# Altium PCB transformer.PcbDoc (part 2 of 3)
Units mm, origin at the board's own origin, x right, y up, seen from the top; angles counter-clockwise.
Board outline 350 x 350 mm, 3 copper layers (GND Top, Middle Layer, GND Bottom), stack 0.497 mm thick; 13 components, 13 nets, 121 pads, 5535 vias.
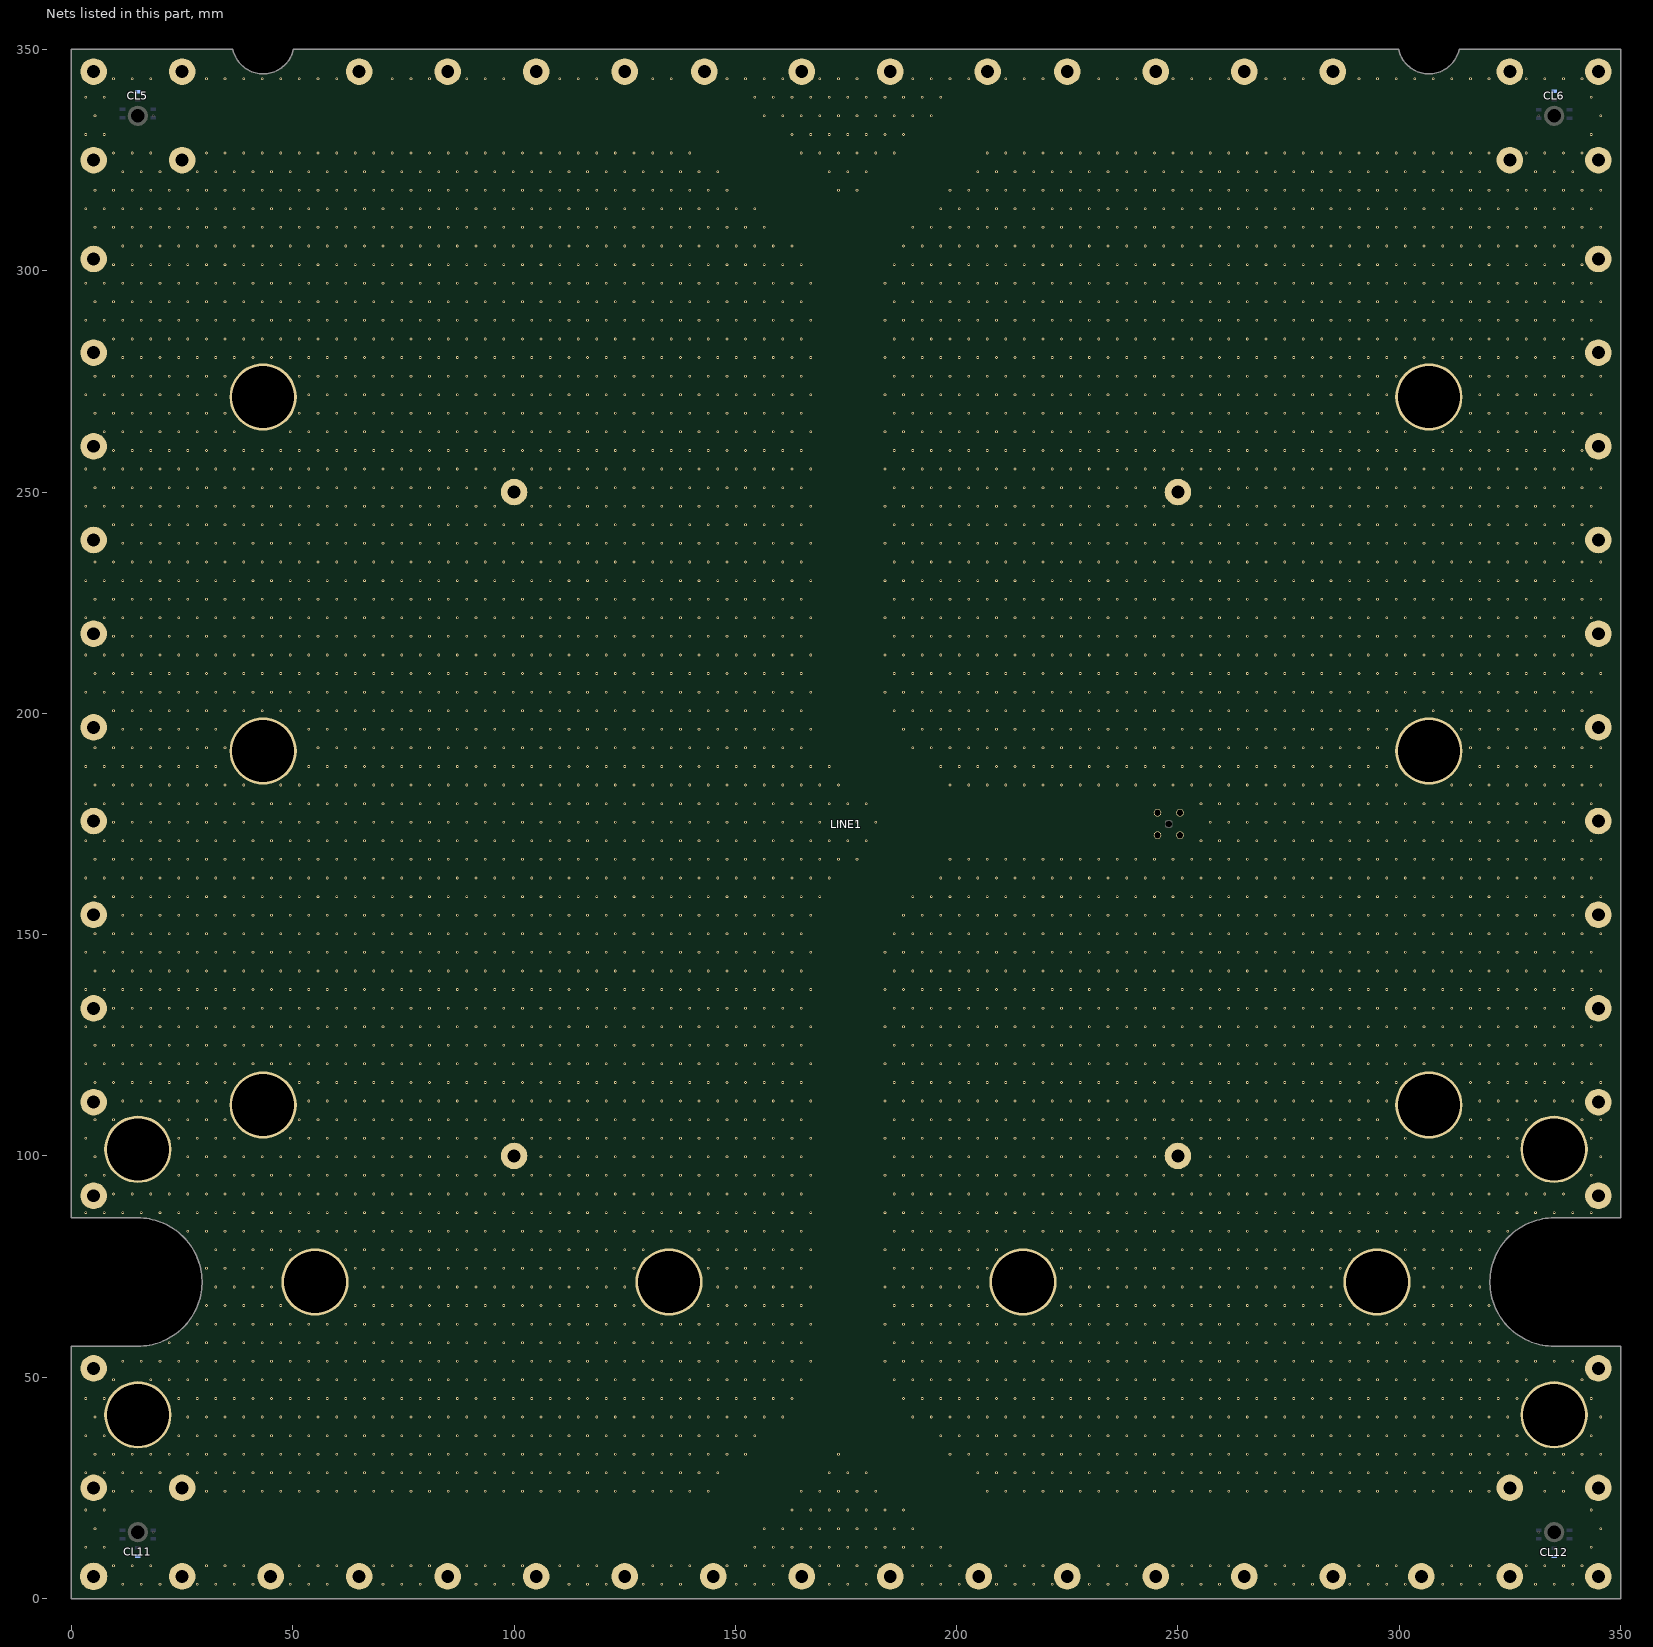
[diagram p3: the nets of this part, all layers, seen from the top]

## Via types
v1: diameter 0.6/0.6/0.6 (per signal layer), hole 0.3, GND Top to GND Bottom, 5535 vias

## Nets (pads, with @x,y where several pads share a name; then routed paths per layer and width w, separated by ;. In a path a pad name is that pad's centre, name@x,y a point inside that pad or via, vN(x,y) a via of type N, cw(c..) or ccw(c..) an arc to the next point about the centre after c; other vN are vias at no path point) (continued)
GND: (continued)
  other v1: 11.6,3.2 15.8,3.2 20,3.2 28.4,3.2 32.6,3.2 36.8,3.2 41,3.2 49.4,3.2 53.6,3.2 57.8,3.2 70.4,3.2 74.6,3.2 78.8,3.2 91.4,3.2 95.6,3.2 99.8,3.2 112.4,3.2 116.6,3.2 120.8,3.2 129.2,3.2 133.4,3.2 137.6,3.2 150.2,3.2 154.4,3.2 158.6,3.2 171.2,3.2 175.4,3.2 179.6,3.2 192.2,3.2 196.4,3.2 200.6,3.2 209,3.2 213.2,3.2 217.4,3.2 221.6,3.2 230,3.2 234.2,3.2 238.4,3.2 251,3.2 255.2,3.2 259.4,3.2 272,3.2 276.2,3.2 280.4,3.2 288.8,3.2 293,3.2 297.2,3.2 301.4,3.2 309.8,3.2 314,3.2 318.2,3.2 330.8,3.2 335,3.2 339.2,3.2 9.5,7.4 13.7,7.4 17.9,7.4 30.5,7.4 34.7,7.4 38.9,7.4 51.5,7.4 55.7,7.4 59.9,7.4 68.3,7.4 72.5,7.4 76.7,7.4 80.9,7.4 89.3,7.4 93.5,7.4 97.7,7.4 101.9,7.4 110.3,7.4 114.5,7.4 118.7,7.4 131.3,7.4 135.5,7.4 139.7,7.4 148.1,7.4 152.3,7.4 156.5,7.4 160.7,7.4 169.1,7.4 173.3,7.4 177.5,7.4 181.7,7.4 190.1,7.4 194.3,7.4 198.5,7.4 211.1,7.4 215.3,7.4 219.5,7.4 232.1,7.4 236.3,7.4 240.5,7.4 248.9,7.4 253.1,7.4 257.3,7.4 261.5,7.4 269.9,7.4 274.1,7.4 278.3,7.4 290.9,7.4 295.1,7.4 299.3,7.4 311.9,7.4 316.1,7.4 320.3,7.4 328.7,7.4 332.9,7.4 337.1,7.4 341.3,7.4 3.2,11.6 7.4,11.6 154.4,11.6 158.6,11.6 162.8,11.6 167,11.6 171.2,11.6 175.4,11.6 179.6,11.6 183.8,11.6 188,11.6 192.2,11.6 196.4,11.6 343.4,11.6 5.3,15.8 156.5,15.8 160.7,15.8 164.9,15.8 169.1,15.8 173.3,15.8 177.5,15.8 181.7,15.8 185.9,15.8 190.1,15.8 345.5,15.8 3.2,20 7.4,20 162.8,20 167,20 171.2,20 175.4,20 179.6,20 183.8,20 188,20 343.4,20 9.5,24.2 13.7,24.2 17.9,24.2 30.5,24.2 34.7,24.2 38.9,24.2 43.1,24.2 47.3,24.2 51.5,24.2 55.7,24.2 59.9,24.2 64.1,24.2 68.3,24.2 72.5,24.2 76.7,24.2 80.9,24.2 85.1,24.2 89.3,24.2 93.5,24.2 97.7,24.2 101.9,24.2 106.1,24.2 110.3,24.2 114.5,24.2 118.7,24.2 122.9,24.2 127.1,24.2 131.3,24.2 135.5,24.2 139.7,24.2 143.9,24.2 164.9,24.2 169.1,24.2 173.3,24.2 177.5,24.2 181.7,24.2 206.9,24.2 211.1,24.2 215.3,24.2 219.5,24.2 223.7,24.2 227.9,24.2 232.1,24.2 236.3,24.2 240.5,24.2 244.7,24.2 248.9,24.2 253.1,24.2 257.3,24.2 261.5,24.2 265.7,24.2 269.9,24.2 274.1,24.2 278.3,24.2 282.5,24.2 286.7,24.2 290.9,24.2 295.1,24.2 299.3,24.2 303.5,24.2 307.7,24.2 311.9,24.2 316.1,24.2 320.3,24.2 332.9,24.2 337.1,24.2 3.2,28.4 7.4,28.4 11.6,28.4 15.8,28.4 20,28.4 28.4,28.4 32.6,28.4 36.8,28.4 41,28.4 45.2,28.4 49.4,28.4 53.6,28.4 57.8,28.4 62,28.4 66.2,28.4 70.4,28.4 74.6,28.4 78.8,28.4 83,28.4 87.2,28.4 91.4,28.4 95.6,28.4 99.8,28.4 104,28.4 108.2,28.4 112.4,28.4 116.6,28.4 120.8,28.4 125,28.4 129.2,28.4 133.4,28.4 137.6,28.4 141.8,28.4 146,28.4 171.2,28.4 175.4,28.4 179.6,28.4 204.8,28.4 209,28.4 213.2,28.4 217.4,28.4 221.6,28.4 225.8,28.4 230,28.4 234.2,28.4 238.4,28.4 242.6,28.4 246.8,28.4 251,28.4 255.2,28.4 259.4,28.4 263.6,28.4 267.8,28.4 272,28.4 276.2,28.4 280.4,28.4 284.6,28.4 288.8,28.4 293,28.4 297.2,28.4 301.4,28.4 305.6,28.4 309.8,28.4 314,28.4 318.2,28.4 322.4,28.4 330.8,28.4 335,28.4 339.2,28.4 5.3,32.6 9.5,32.6 13.7,32.6 17.9,32.6 22.1,32.6 26.3,32.6 30.5,32.6 34.7,32.6 38.9,32.6 43.1,32.6 47.3,32.6 51.5,32.6 55.7,32.6 59.9,32.6 64.1,32.6 68.3,32.6 72.5,32.6 76.7,32.6 80.9,32.6 85.1,32.6 89.3,32.6 93.5,32.6 97.7,32.6 101.9,32.6 106.1,32.6 110.3,32.6 114.5,32.6 118.7,32.6 122.9,32.6 127.1,32.6 131.3,32.6 135.5,32.6 139.7,32.6 143.9,32.6 148.1,32.6 152.3,32.6 173.3,32.6 198.5,32.6 202.7,32.6 206.9,32.6 211.1,32.6 215.3,32.6 219.5,32.6 223.7,32.6 227.9,32.6 232.1,32.6 236.3,32.6 240.5,32.6 244.7,32.6 248.9,32.6 253.1,32.6 257.3,32.6 261.5,32.6 265.7,32.6 269.9,32.6 274.1,32.6 278.3,32.6 282.5,32.6 286.7,32.6 290.9,32.6 295.1,32.6 299.3,32.6 303.5,32.6 307.7,32.6 311.9,32.6 316.1,32.6 320.3,32.6 324.5,32.6 328.7,32.6 332.9,32.6 337.1,32.6 341.3,32.6 345.5,32.6 3.2,36.8 7.4,36.8 24.2,36.8 28.4,36.8 32.6,36.8 36.8,36.8 41,36.8 45.2,36.8 49.4,36.8 53.6,36.8 57.8,36.8 62,36.8 66.2,36.8 70.4,36.8 74.6,36.8 78.8,36.8 83,36.8 87.2,36.8 91.4,36.8 95.6,36.8 99.8,36.8 104,36.8 108.2,36.8 112.4,36.8 116.6,36.8 120.8,36.8 125,36.8 129.2,36.8 133.4,36.8 137.6,36.8 141.8,36.8 146,36.8 150.2,36.8 154.4,36.8 196.4,36.8 200.6,36.8 204.8,36.8 209,36.8 213.2,36.8 217.4,36.8 221.6,36.8 225.8,36.8 230,36.8 234.2,36.8 238.4,36.8 242.6,36.8 246.8,36.8 251,36.8 255.2,36.8 259.4,36.8 263.6,36.8 267.8,36.8 272,36.8 276.2,36.8 280.4,36.8 284.6,36.8 288.8,36.8 293,36.8 297.2,36.8 301.4,36.8 305.6,36.8 309.8,36.8 314,36.8 318.2,36.8 322.4,36.8 326.6,36.8 343.4,36.8 5.3,41 26.3,41 30.5,41 34.7,41 38.9,41 43.1,41 47.3,41 51.5,41 55.7,41 59.9,41 64.1,41 68.3,41 72.5,41 76.7,41 80.9,41 85.1,41 89.3,41 93.5,41 97.7,41 101.9,41 106.1,41 110.3,41 114.5,41 118.7,41 122.9,41 127.1,41 131.3,41 135.5,41 139.7,41 143.9,41 148.1,41 152.3,41 156.5,41 160.7,41 190.1,41 194.3,41 198.5,41 202.7,41 206.9,41 211.1,41 215.3,41 219.5,41 223.7,41 227.9,41 232.1,41 236.3,41 240.5,41 244.7,41 248.9,41 253.1,41 257.3,41 261.5,41 265.7,41 269.9,41 274.1,41 278.3,41 282.5,41 286.7,41 290.9,41 295.1,41 299.3,41 303.5,41 307.7,41 311.9,41 316.1,41 320.3,41 324.5,41 345.5,41 3.2,45.2 7.4,45.2 24.2,45.2 28.4,45.2 32.6,45.2 36.8,45.2 41,45.2 45.2,45.2 49.4,45.2 53.6,45.2 57.8,45.2 62,45.2 66.2,45.2 70.4,45.2 74.6,45.2 78.8,45.2 83,45.2 87.2,45.2 91.4,45.2 95.6,45.2 99.8,45.2 104,45.2 108.2,45.2 112.4,45.2 116.6,45.2 120.8,45.2 125,45.2 129.2,45.2 133.4,45.2 137.6,45.2 141.8,45.2 146,45.2 150.2,45.2 154.4,45.2 158.6,45.2 162.8,45.2 188,45.2 192.2,45.2 196.4,45.2 200.6,45.2 204.8,45.2 209,45.2 213.2,45.2 217.4,45.2 221.6,45.2 225.8,45.2 230,45.2 234.2,45.2 238.4,45.2 242.6,45.2 246.8,45.2 251,45.2 255.2,45.2 259.4,45.2 263.6,45.2 267.8,45.2 272,45.2 276.2,45.2 280.4,45.2 284.6,45.2 288.8,45.2 293,45.2 297.2,45.2 301.4,45.2 305.6,45.2 309.8,45.2 314,45.2 318.2,45.2 322.4,45.2 326.6,45.2 343.4,45.2 9.5,49.4 17.9,49.4 22.1,49.4 26.3,49.4 30.5,49.4 34.7,49.4 38.9,49.4 43.1,49.4 47.3,49.4 51.5,49.4 55.7,49.4 59.9,49.4 64.1,49.4 68.3,49.4 72.5,49.4 76.7,49.4 80.9,49.4 85.1,49.4 89.3,49.4 93.5,49.4 97.7,49.4 101.9,49.4 106.1,49.4 110.3,49.4 114.5,49.4 118.7,49.4 122.9,49.4 127.1,49.4 131.3,49.4 135.5,49.4 139.7,49.4 143.9,49.4 148.1,49.4 152.3,49.4 156.5,49.4 160.7,49.4 164.9,49.4 185.9,49.4 190.1,49.4 194.3,49.4 198.5,49.4 202.7,49.4 206.9,49.4 211.1,49.4 215.3,49.4 219.5,49.4 223.7,49.4 227.9,49.4 232.1,49.4 236.3,49.4 240.5,49.4 244.7,49.4 248.9,49.4 253.1,49.4 257.3,49.4 261.5,49.4 265.7,49.4 269.9,49.4 274.1,49.4 278.3,49.4 282.5,49.4 286.7,49.4 290.9,49.4 295.1,49.4 299.3,49.4 303.5,49.4 307.7,49.4 311.9,49.4 316.1,49.4 320.3,49.4 324.5,49.4 328.7,49.4 341.3,49.4 11.6,53.6 15.8,53.6 20,53.6 24.2,53.6 28.4,53.6 32.6,53.6 36.8,53.6 41,53.6 45.2,53.6 49.4,53.6 53.6,53.6 57.8,53.6 62,53.6 66.2,53.6 70.4,53.6 74.6,53.6 78.8,53.6 83,53.6 87.2,53.6 91.4,53.6 95.6,53.6 99.8,53.6 104,53.6 108.2,53.6 112.4,53.6 116.6,53.6 120.8,53.6 125,53.6 129.2,53.6 133.4,53.6 137.6,53.6 141.8,53.6 146,53.6 150.2,53.6 154.4,53.6 158.6,53.6 162.8,53.6 167,53.6 183.8,53.6 188,53.6 192.2,53.6 196.4,53.6 200.6,53.6 204.8,53.6 209,53.6 213.2,53.6 217.4,53.6 221.6,53.6 225.8,53.6 230,53.6 234.2,53.6 238.4,53.6 242.6,53.6 246.8,53.6 251,53.6 255.2,53.6 259.4,53.6 263.6,53.6 267.8,53.6 272,53.6 276.2,53.6 280.4,53.6 284.6,53.6 288.8,53.6 293,53.6 297.2,53.6 301.4,53.6 305.6,53.6 309.8,53.6 314,53.6 318.2,53.6 322.4,53.6 326.6,53.6 330.8,53.6 335,53.6 339.2,53.6 22.1,57.8 26.3,57.8 30.5,57.8 34.7,57.8 38.9,57.8 43.1,57.8 47.3,57.8 51.5,57.8 55.7,57.8 59.9,57.8 64.1,57.8 68.3,57.8 72.5,57.8 76.7,57.8 80.9,57.8 85.1,57.8 89.3,57.8 93.5,57.8 97.7,57.8 101.9,57.8 106.1,57.8 110.3,57.8 114.5,57.8 118.7,57.8 122.9,57.8 127.1,57.8 131.3,57.8 135.5,57.8 139.7,57.8 143.9,57.8 148.1,57.8 152.3,57.8 156.5,57.8 160.7,57.8 164.9,57.8 185.9,57.8 190.1,57.8 194.3,57.8 198.5,57.8 202.7,57.8 206.9,57.8 211.1,57.8 215.3,57.8 219.5,57.8 223.7,57.8 227.9,57.8 232.1,57.8 236.3,57.8 240.5,57.8 244.7,57.8 248.9,57.8 253.1,57.8 257.3,57.8 261.5,57.8 265.7,57.8 269.9,57.8 274.1,57.8 278.3,57.8 282.5,57.8 286.7,57.8 290.9,57.8 295.1,57.8 299.3,57.8 303.5,57.8 307.7,57.8 311.9,57.8 316.1,57.8 320.3,57.8 324.5,57.8 28.4,62 32.6,62 36.8,62 41,62 45.2,62 49.4,62 53.6,62 57.8,62 62,62 66.2,62 70.4,62 74.6,62 78.8,62 83,62 87.2,62 91.4,62 95.6,62 99.8,62 104,62 108.2,62 112.4,62 116.6,62 120.8,62 125,62 129.2,62 133.4,62 137.6,62 141.8,62 146,62 150.2,62 154.4,62 158.6,62 162.8,62 167,62 183.8,62 188,62 192.2,62 196.4,62 200.6,62 204.8,62 209,62 213.2,62 217.4,62 221.6,62 225.8,62 230,62 234.2,62 238.4,62 242.6,62 246.8,62 251,62 255.2,62 259.4,62 263.6,62 267.8,62 272,62 276.2,62 280.4,62 284.6,62 288.8,62 293,62 297.2,62 301.4,62 305.6,62 309.8,62 314,62 318.2,62 322.4,62 30.5,66.2 34.7,66.2 38.9,66.2 43.1,66.2 47.3,66.2 64.1,66.2 68.3,66.2 72.5,66.2 76.7,66.2 80.9,66.2 85.1,66.2 89.3,66.2 93.5,66.2 97.7,66.2 101.9,66.2 106.1,66.2 110.3,66.2 114.5,66.2 118.7,66.2 122.9,66.2 127.1,66.2 143.9,66.2 148.1,66.2 152.3,66.2 156.5,66.2 160.7,66.2 164.9,66.2 185.9,66.2 190.1,66.2 194.3,66.2 198.5,66.2 202.7,66.2 206.9,66.2 223.7,66.2 227.9,66.2 232.1,66.2 236.3,66.2 240.5,66.2 244.7,66.2 248.9,66.2 253.1,66.2 257.3,66.2 261.5,66.2 265.7,66.2 269.9,66.2 274.1,66.2 278.3,66.2 282.5,66.2 286.7,66.2 303.5,66.2 307.7,66.2 311.9,66.2 316.1,66.2 320.3,66.2 32.6,70.4 36.8,70.4 41,70.4 45.2,70.4 66.2,70.4 70.4,70.4 74.6,70.4 78.8,70.4 83,70.4 87.2,70.4 91.4,70.4 95.6,70.4 99.8,70.4 104,70.4 108.2,70.4 112.4,70.4 116.6,70.4 120.8,70.4 125,70.4 146,70.4 150.2,70.4 154.4,70.4 158.6,70.4 162.8,70.4 167,70.4 183.8,70.4 188,70.4 192.2,70.4 196.4,70.4 200.6,70.4 204.8,70.4 225.8,70.4 230,70.4 234.2,70.4 238.4,70.4 242.6,70.4 246.8,70.4 251,70.4 255.2,70.4 259.4,70.4 263.6,70.4 267.8,70.4 272,70.4 276.2,70.4 280.4,70.4 284.6,70.4 305.6,70.4 309.8,70.4 314,70.4 318.2,70.4 30.5,74.6 34.7,74.6 38.9,74.6 43.1,74.6 64.1,74.6 68.3,74.6 72.5,74.6 76.7,74.6 80.9,74.6 85.1,74.6 89.3,74.6 93.5,74.6 97.7,74.6 101.9,74.6 106.1,74.6 110.3,74.6 114.5,74.6 118.7,74.6 122.9,74.6 127.1,74.6 143.9,74.6 148.1,74.6 152.3,74.6 156.5,74.6 160.7,74.6 164.9,74.6 185.9,74.6 190.1,74.6 194.3,74.6 198.5,74.6 202.7,74.6 206.9,74.6 223.7,74.6 227.9,74.6 232.1,74.6 236.3,74.6 240.5,74.6 244.7,74.6 248.9,74.6 253.1,74.6 257.3,74.6 261.5,74.6 265.7,74.6 269.9,74.6 274.1,74.6 278.3,74.6 282.5,74.6 286.7,74.6 303.5,74.6 307.7,74.6 311.9,74.6 316.1,74.6 32.6,78.8 36.8,78.8 41,78.8 45.2,78.8 49.4,78.8 62,78.8 66.2,78.8 70.4,78.8 74.6,78.8 78.8,78.8 83,78.8 87.2,78.8 91.4,78.8 95.6,78.8 99.8,78.8 104,78.8 108.2,78.8 112.4,78.8 116.6,78.8 120.8,78.8 125,78.8 129.2,78.8 141.8,78.8 146,78.8 150.2,78.8 154.4,78.8 158.6,78.8 162.8,78.8 167,78.8 183.8,78.8 188,78.8 192.2,78.8 196.4,78.8 200.6,78.8 204.8,78.8 209,78.8 221.6,78.8 225.8,78.8 230,78.8 234.2,78.8 238.4,78.8 242.6,78.8 246.8,78.8 251,78.8 255.2,78.8 259.4,78.8 263.6,78.8 267.8,78.8 272,78.8 276.2,78.8 280.4,78.8 284.6,78.8 288.8,78.8 301.4,78.8 305.6,78.8 309.8,78.8 314,78.8 318.2,78.8 26.3,83 30.5,83 34.7,83 38.9,83 43.1,83 47.3,83 51.5,83 55.7,83 59.9,83 64.1,83 68.3,83 72.5,83 76.7,83 80.9,83 85.1,83 89.3,83 93.5,83 97.7,83 101.9,83 106.1,83 110.3,83 114.5,83 118.7,83 122.9,83 127.1,83 131.3,83 135.5,83 139.7,83 143.9,83 148.1,83 152.3,83 156.5,83 160.7,83 164.9,83 185.9,83 190.1,83 194.3,83 198.5,83 202.7,83 206.9,83 211.1,83 215.3,83 219.5,83 223.7,83 227.9,83 232.1,83 236.3,83 240.5,83 244.7,83 248.9,83 253.1,83 257.3,83 261.5,83 265.7,83 269.9,83 274.1,83 278.3,83 282.5,83 286.7,83 290.9,83 295.1,83 299.3,83 303.5,83 307.7,83 311.9,83 316.1,83 320.3,83 324.5,83 3.2,87.2 7.4,87.2 11.6,87.2 15.8,87.2 20,87.2 24.2,87.2 28.4,87.2 32.6,87.2 36.8,87.2 41,87.2 45.2,87.2 49.4,87.2 53.6,87.2 57.8,87.2 62,87.2 66.2,87.2 70.4,87.2 74.6,87.2 78.8,87.2 83,87.2 87.2,87.2 91.4,87.2 95.6,87.2 99.8,87.2 104,87.2 108.2,87.2 112.4,87.2 116.6,87.2 120.8,87.2 125,87.2 129.2,87.2 133.4,87.2 137.6,87.2 141.8,87.2 146,87.2 150.2,87.2 154.4,87.2 158.6,87.2 162.8,87.2 167,87.2 183.8,87.2 188,87.2 192.2,87.2 196.4,87.2 200.6,87.2 204.8,87.2 209,87.2 213.2,87.2 217.4,87.2 221.6,87.2 225.8,87.2 230,87.2 234.2,87.2 238.4,87.2 242.6,87.2 246.8,87.2 251,87.2 255.2,87.2 259.4,87.2 263.6,87.2 267.8,87.2 272,87.2 276.2,87.2 280.4,87.2 284.6,87.2 288.8,87.2 293,87.2 297.2,87.2 301.4,87.2 305.6,87.2 309.8,87.2 314,87.2 318.2,87.2 322.4,87.2 326.6,87.2 330.8,87.2 335,87.2 339.2,87.2 343.4,87.2 9.5,91.4 13.7,91.4 17.9,91.4 22.1,91.4 26.3,91.4 30.5,91.4 34.7,91.4 38.9,91.4 43.1,91.4 47.3,91.4 51.5,91.4 55.7,91.4 59.9,91.4 64.1,91.4 68.3,91.4 72.5,91.4 76.7,91.4 80.9,91.4 85.1,91.4 89.3,91.4 93.5,91.4 97.7,91.4 101.9,91.4 106.1,91.4 110.3,91.4 114.5,91.4 118.7,91.4 122.9,91.4 127.1,91.4 131.3,91.4 135.5,91.4 139.7,91.4 143.9,91.4 148.1,91.4 152.3,91.4 156.5,91.4 160.7,91.4 164.9,91.4 185.9,91.4 190.1,91.4 194.3,91.4 198.5,91.4 202.7,91.4 206.9,91.4 211.1,91.4 215.3,91.4 219.5,91.4 223.7,91.4 227.9,91.4 232.1,91.4 236.3,91.4 240.5,91.4 244.7,91.4 248.9,91.4 253.1,91.4 257.3,91.4 261.5,91.4 265.7,91.4 269.9,91.4 274.1,91.4 278.3,91.4 282.5,91.4 286.7,91.4 290.9,91.4 295.1,91.4 299.3,91.4 303.5,91.4 307.7,91.4 311.9,91.4 316.1,91.4 320.3,91.4 324.5,91.4 328.7,91.4 332.9,91.4 337.1,91.4 3.2,95.6 7.4,95.6 24.2,95.6 28.4,95.6 32.6,95.6 36.8,95.6 41,95.6 45.2,95.6 49.4,95.6 53.6,95.6 57.8,95.6 62,95.6 66.2,95.6 70.4,95.6 74.6,95.6 78.8,95.6 83,95.6 87.2,95.6 91.4,95.6 95.6,95.6 99.8,95.6 104,95.6 108.2,95.6 112.4,95.6 116.6,95.6 120.8,95.6 125,95.6 129.2,95.6 133.4,95.6 137.6,95.6 141.8,95.6 146,95.6 150.2,95.6 154.4,95.6 158.6,95.6 162.8,95.6 167,95.6 183.8,95.6 188,95.6 192.2,95.6 196.4,95.6 200.6,95.6 204.8,95.6 209,95.6 213.2,95.6 217.4,95.6 221.6,95.6 225.8,95.6 230,95.6 234.2,95.6 238.4,95.6 242.6,95.6 246.8,95.6 251,95.6 255.2,95.6 259.4,95.6 263.6,95.6 267.8,95.6 272,95.6 276.2,95.6 280.4,95.6 284.6,95.6 288.8,95.6 293,95.6 297.2,95.6 301.4,95.6 305.6,95.6 309.8,95.6 314,95.6 318.2,95.6 322.4,95.6 326.6,95.6 343.4,95.6 5.3,99.8 26.3,99.8 30.5,99.8 34.7,99.8 38.9,99.8 43.1,99.8 47.3,99.8 51.5,99.8 55.7,99.8 59.9,99.8 64.1,99.8 68.3,99.8 72.5,99.8 76.7,99.8 80.9,99.8 85.1,99.8 89.3,99.8 93.5,99.8 106.1,99.8 110.3,99.8 114.5,99.8 118.7,99.8 122.9,99.8 127.1,99.8 131.3,99.8 135.5,99.8 139.7,99.8 143.9,99.8 148.1,99.8 152.3,99.8 156.5,99.8 160.7,99.8 164.9,99.8 185.9,99.8 190.1,99.8 194.3,99.8 198.5,99.8 202.7,99.8 206.9,99.8 211.1,99.8 215.3,99.8 219.5,99.8 223.7,99.8 227.9,99.8 232.1,99.8 236.3,99.8 240.5,99.8 244.7,99.8 257.3,99.8 261.5,99.8 265.7,99.8 269.9,99.8 274.1,99.8 278.3,99.8 282.5,99.8 286.7,99.8 290.9,99.8 295.1,99.8 299.3,99.8 303.5,99.8 307.7,99.8 311.9,99.8 316.1,99.8 320.3,99.8 324.5,99.8 345.5,99.8 3.2,104 24.2,104 28.4,104 32.6,104 36.8,104 49.4,104 53.6,104 57.8,104 62,104 66.2,104 70.4,104 74.6,104 78.8,104 83,104 87.2,104 91.4,104 95.6,104 99.8,104 104,104 108.2,104 112.4,104 116.6,104 120.8,104 125,104 129.2,104 133.4,104 137.6,104 141.8,104 146,104 150.2,104 154.4,104 158.6,104 162.8,104 167,104 183.8,104 188,104 192.2,104 196.4,104 200.6,104 204.8,104 209,104 213.2,104 217.4,104 221.6,104 225.8,104 230,104 234.2,104 238.4,104 242.6,104 246.8,104 251,104 255.2,104 259.4,104 263.6,104 267.8,104 272,104 276.2,104 280.4,104 284.6,104 288.8,104 293,104 297.2,104 301.4,104 314,104 318.2,104 322.4,104 326.6,104 343.4,104 5.3,108.2 9.5,108.2 22.1,108.2 26.3,108.2 30.5,108.2 34.7,108.2 51.5,108.2 55.7,108.2 59.9,108.2 64.1,108.2 68.3,108.2 72.5,108.2 76.7,108.2 80.9,108.2 85.1,108.2 89.3,108.2 93.5,108.2 97.7,108.2 101.9,108.2 106.1,108.2 110.3,108.2 114.5,108.2 118.7,108.2 122.9,108.2 127.1,108.2 131.3,108.2 135.5,108.2 139.7,108.2 143.9,108.2 148.1,108.2 152.3,108.2 156.5,108.2 160.7,108.2 164.9,108.2 185.9,108.2 190.1,108.2 194.3,108.2 198.5,108.2 202.7,108.2 206.9,108.2 211.1,108.2 215.3,108.2 219.5,108.2 223.7,108.2 227.9,108.2 232.1,108.2 236.3,108.2 240.5,108.2 244.7,108.2 248.9,108.2 253.1,108.2 257.3,108.2 261.5,108.2 265.7,108.2 269.9,108.2 274.1,108.2 278.3,108.2 282.5,108.2 286.7,108.2 290.9,108.2 295.1,108.2 316.1,108.2 320.3,108.2 324.5,108.2 328.7,108.2 341.3,108.2 345.5,108.2 11.6,112.4 15.8,112.4 20,112.4 24.2,112.4 28.4,112.4 32.6,112.4 53.6,112.4 57.8,112.4 62,112.4 66.2,112.4 70.4,112.4 74.6,112.4 78.8,112.4 83,112.4 87.2,112.4 91.4,112.4 95.6,112.4 99.8,112.4 104,112.4 108.2,112.4 112.4,112.4 116.6,112.4 120.8,112.4 125,112.4 129.2,112.4 133.4,112.4 137.6,112.4 141.8,112.4 146,112.4 150.2,112.4 154.4,112.4 158.6,112.4 162.8,112.4 167,112.4 183.8,112.4 188,112.4 192.2,112.4 196.4,112.4 200.6,112.4 204.8,112.4 209,112.4 213.2,112.4 217.4,112.4 221.6,112.4 225.8,112.4 230,112.4 234.2,112.4 238.4,112.4 242.6,112.4 246.8,112.4 251,112.4 255.2,112.4 259.4,112.4 263.6,112.4 267.8,112.4 272,112.4 276.2,112.4 280.4,112.4 284.6,112.4 288.8,112.4 293,112.4 297.2,112.4 318.2,112.4 322.4,112.4 326.6,112.4 330.8,112.4 335,112.4 339.2,112.4 5.3,116.6 9.5,116.6 13.7,116.6 17.9,116.6 22.1,116.6 26.3,116.6 30.5,116.6 34.7,116.6 51.5,116.6 55.7,116.6 59.9,116.6 64.1,116.6 68.3,116.6 72.5,116.6 76.7,116.6 80.9,116.6 85.1,116.6 89.3,116.6 93.5,116.6 97.7,116.6 101.9,116.6 106.1,116.6 110.3,116.6 114.5,116.6 118.7,116.6 122.9,116.6 127.1,116.6 131.3,116.6 135.5,116.6 139.7,116.6 143.9,116.6 148.1,116.6 152.3,116.6 156.5,116.6 160.7,116.6 164.9,116.6 185.9,116.6 190.1,116.6 194.3,116.6 198.5,116.6 202.7,116.6 206.9,116.6 211.1,116.6 215.3,116.6 219.5,116.6 223.7,116.6 227.9,116.6 232.1,116.6 236.3,116.6 240.5,116.6 244.7,116.6 248.9,116.6 253.1,116.6 257.3,116.6 261.5,116.6 265.7,116.6 269.9,116.6 274.1,116.6 278.3,116.6 282.5,116.6 286.7,116.6 290.9,116.6 295.1,116.6 299.3,116.6 316.1,116.6 320.3,116.6 324.5,116.6 328.7,116.6 332.9,116.6 337.1,116.6 341.3,116.6 345.5,116.6 3.2,120.8 7.4,120.8 11.6,120.8 15.8,120.8 20,120.8 24.2,120.8 28.4,120.8 32.6,120.8 36.8,120.8 41,120.8 45.2,120.8 49.4,120.8 53.6,120.8 57.8,120.8 62,120.8 66.2,120.8 70.4,120.8 74.6,120.8 78.8,120.8 83,120.8 87.2,120.8 91.4,120.8 95.6,120.8 99.8,120.8 104,120.8 108.2,120.8 112.4,120.8 116.6,120.8 120.8,120.8 125,120.8 129.2,120.8 133.4,120.8 137.6,120.8 141.8,120.8 146,120.8 150.2,120.8 154.4,120.8 158.6,120.8 162.8,120.8 167,120.8 183.8,120.8 188,120.8 192.2,120.8 196.4,120.8 200.6,120.8 204.8,120.8 209,120.8 213.2,120.8 217.4,120.8 221.6,120.8 225.8,120.8 230,120.8 234.2,120.8 238.4,120.8 242.6,120.8 246.8,120.8 251,120.8 255.2,120.8 259.4,120.8 263.6,120.8 267.8,120.8 272,120.8 276.2,120.8 280.4,120.8 284.6,120.8 288.8,120.8 293,120.8 297.2,120.8 301.4,120.8 305.6,120.8 309.8,120.8 314,120.8 318.2,120.8 322.4,120.8 326.6,120.8 330.8,120.8 335,120.8 339.2,120.8 343.4,120.8 5.3,125 9.5,125 13.7,125 17.9,125 22.1,125 26.3,125 30.5,125 34.7,125 38.9,125 43.1,125 47.3,125 51.5,125 55.7,125 59.9,125 64.1,125 68.3,125 72.5,125 76.7,125 80.9,125 85.1,125 89.3,125 93.5,125 97.7,125 101.9,125 106.1,125 110.3,125 114.5,125 118.7,125 122.9,125 127.1,125 131.3,125 135.5,125 139.7,125 143.9,125 148.1,125 152.3,125 156.5,125 160.7,125 164.9,125 185.9,125 190.1,125 194.3,125 198.5,125 202.7,125 206.9,125 211.1,125 215.3,125 219.5,125 223.7,125 227.9,125 232.1,125 236.3,125 240.5,125 244.7,125 248.9,125 253.1,125 257.3,125 261.5,125 265.7,125 269.9,125 274.1,125 278.3,125 282.5,125 286.7,125 290.9,125 295.1,125 299.3,125 303.5,125 307.7,125 311.9,125 316.1,125 320.3,125 324.5,125 328.7,125 332.9,125 337.1,125 341.3,125 345.5,125 3.2,129.2 7.4,129.2 11.6,129.2 15.8,129.2 20,129.2 24.2,129.2 28.4,129.2 32.6,129.2 36.8,129.2 41,129.2 45.2,129.2 49.4,129.2 53.6,129.2 57.8,129.2 62,129.2 66.2,129.2 70.4,129.2 74.6,129.2 78.8,129.2 83,129.2 87.2,129.2 91.4,129.2 95.6,129.2 99.8,129.2 104,129.2 108.2,129.2 112.4,129.2 116.6,129.2 120.8,129.2 125,129.2 129.2,129.2 133.4,129.2 137.6,129.2 141.8,129.2 146,129.2 150.2,129.2 154.4,129.2 158.6,129.2 162.8,129.2 167,129.2 183.8,129.2 188,129.2 192.2,129.2 196.4,129.2 200.6,129.2 204.8,129.2 209,129.2 213.2,129.2 217.4,129.2 221.6,129.2 225.8,129.2 230,129.2 234.2,129.2 238.4,129.2 242.6,129.2 246.8,129.2 251,129.2 255.2,129.2 259.4,129.2 263.6,129.2 267.8,129.2 272,129.2 276.2,129.2 280.4,129.2 284.6,129.2 288.8,129.2 293,129.2 297.2,129.2 301.4,129.2 305.6,129.2 309.8,129.2 314,129.2 318.2,129.2 322.4,129.2 326.6,129.2 330.8,129.2 335,129.2 339.2,129.2 343.4,129.2 9.5,133.4 13.7,133.4 17.9,133.4 22.1,133.4 26.3,133.4 30.5,133.4 34.7,133.4 38.9,133.4 43.1,133.4 47.3,133.4 51.5,133.4 55.7,133.4 59.9,133.4 64.1,133.4 68.3,133.4 72.5,133.4 76.7,133.4 80.9,133.4 85.1,133.4 89.3,133.4 93.5,133.4 97.7,133.4 101.9,133.4 106.1,133.4 110.3,133.4 114.5,133.4 118.7,133.4 122.9,133.4 127.1,133.4 131.3,133.4 135.5,133.4 139.7,133.4 143.9,133.4 148.1,133.4 152.3,133.4 156.5,133.4 160.7,133.4 164.9,133.4 185.9,133.4 190.1,133.4 194.3,133.4 198.5,133.4 202.7,133.4 206.9,133.4 211.1,133.4 215.3,133.4 219.5,133.4 223.7,133.4 227.9,133.4 232.1,133.4 236.3,133.4 240.5,133.4 244.7,133.4 248.9,133.4 253.1,133.4 257.3,133.4 261.5,133.4 265.7,133.4 269.9,133.4 274.1,133.4 278.3,133.4 282.5,133.4 286.7,133.4 290.9,133.4 295.1,133.4 299.3,133.4 303.5,133.4 307.7,133.4 311.9,133.4 316.1,133.4 320.3,133.4 324.5,133.4 328.7,133.4 332.9,133.4 337.1,133.4 3.2,137.6 7.4,137.6 11.6,137.6 15.8,137.6 20,137.6 24.2,137.6 28.4,137.6 32.6,137.6 36.8,137.6 41,137.6 45.2,137.6 49.4,137.6 53.6,137.6 57.8,137.6 62,137.6 66.2,137.6 70.4,137.6 74.6,137.6 78.8,137.6 83,137.6 87.2,137.6 91.4,137.6 95.6,137.6 99.8,137.6 104,137.6 108.2,137.6 112.4,137.6 116.6,137.6 120.8,137.6 125,137.6 129.2,137.6 133.4,137.6 137.6,137.6 141.8,137.6 146,137.6 150.2,137.6 154.4,137.6 158.6,137.6 162.8,137.6 167,137.6 183.8,137.6 188,137.6 192.2,137.6 196.4,137.6 200.6,137.6 204.8,137.6 209,137.6 213.2,137.6 217.4,137.6 221.6,137.6 225.8,137.6 230,137.6 234.2,137.6 238.4,137.6 242.6,137.6 246.8,137.6 251,137.6 255.2,137.6 259.4,137.6 263.6,137.6 267.8,137.6 272,137.6 276.2,137.6 280.4,137.6 284.6,137.6 288.8,137.6 293,137.6 297.2,137.6 301.4,137.6 305.6,137.6 309.8,137.6 314,137.6 318.2,137.6 322.4,137.6 326.6,137.6 330.8,137.6 335,137.6 339.2,137.6 343.4,137.6 5.3,141.8 9.5,141.8 13.7,141.8 17.9,141.8 22.1,141.8 26.3,141.8 30.5,141.8 34.7,141.8 38.9,141.8 43.1,141.8 47.3,141.8 51.5,141.8 55.7,141.8 59.9,141.8 64.1,141.8 68.3,141.8 72.5,141.8 76.7,141.8 80.9,141.8 85.1,141.8 89.3,141.8 93.5,141.8 97.7,141.8 101.9,141.8 106.1,141.8 110.3,141.8 114.5,141.8 118.7,141.8 122.9,141.8 127.1,141.8 131.3,141.8 135.5,141.8 139.7,141.8 143.9,141.8 148.1,141.8 152.3,141.8 156.5,141.8 160.7,141.8 164.9,141.8 185.9,141.8 190.1,141.8 194.3,141.8 198.5,141.8 202.7,141.8 206.9,141.8 211.1,141.8 215.3,141.8 219.5,141.8 223.7,141.8 227.9,141.8 232.1,141.8 236.3,141.8 240.5,141.8 244.7,141.8 248.9,141.8 253.1,141.8 257.3,141.8 261.5,141.8 265.7,141.8 269.9,141.8 274.1,141.8 278.3,141.8 282.5,141.8 286.7,141.8 290.9,141.8 295.1,141.8 299.3,141.8 303.5,141.8 307.7,141.8 311.9,141.8 316.1,141.8 320.3,141.8 324.5,141.8 328.7,141.8 332.9,141.8 337.1,141.8 341.3,141.8 345.5,141.8 3.2,146 7.4,146 11.6,146 15.8,146 20,146 24.2,146 28.4,146 32.6,146 36.8,146 41,146 45.2,146 49.4,146 53.6,146 57.8,146 62,146 66.2,146 70.4,146 74.6,146 78.8,146 83,146 87.2,146 91.4,146 95.6,146 99.8,146 104,146 108.2,146 112.4,146 116.6,146 120.8,146 125,146 129.2,146 133.4,146 137.6,146 141.8,146 146,146 150.2,146 154.4,146 158.6,146 162.8,146 167,146 183.8,146 188,146 192.2,146 196.4,146 200.6,146 204.8,146 209,146 213.2,146 217.4,146 221.6,146 225.8,146 230,146 234.2,146 238.4,146 242.6,146 246.8,146 251,146 255.2,146 259.4,146 263.6,146 267.8,146 272,146 276.2,146 280.4,146 284.6,146 288.8,146 293,146 297.2,146 301.4,146 305.6,146 309.8,146 314,146 318.2,146 322.4,146 326.6,146 330.8,146 335,146 339.2,146 343.4,146 5.3,150.2 9.5,150.2 13.7,150.2 17.9,150.2 22.1,150.2 26.3,150.2 30.5,150.2 34.7,150.2 38.9,150.2 43.1,150.2 47.3,150.2 51.5,150.2 55.7,150.2 59.9,150.2 64.1,150.2 68.3,150.2 72.5,150.2 76.7,150.2 80.9,150.2 85.1,150.2 89.3,150.2 93.5,150.2 97.7,150.2 101.9,150.2 106.1,150.2 110.3,150.2 114.5,150.2 118.7,150.2 122.9,150.2 127.1,150.2 131.3,150.2 135.5,150.2 139.7,150.2 143.9,150.2 148.1,150.2 152.3,150.2 156.5,150.2 160.7,150.2 164.9,150.2 185.9,150.2 190.1,150.2 194.3,150.2 198.5,150.2 202.7,150.2 206.9,150.2 211.1,150.2 215.3,150.2 219.5,150.2 223.7,150.2 227.9,150.2 232.1,150.2 236.3,150.2 240.5,150.2 244.7,150.2 248.9,150.2 253.1,150.2 257.3,150.2 261.5,150.2 265.7,150.2 269.9,150.2 274.1,150.2 278.3,150.2 282.5,150.2 286.7,150.2 290.9,150.2 295.1,150.2 299.3,150.2 303.5,150.2 307.7,150.2 311.9,150.2 316.1,150.2 320.3,150.2 324.5,150.2 328.7,150.2 332.9,150.2 337.1,150.2 341.3,150.2 345.5,150.2 11.6,154.4 15.8,154.4 20,154.4 24.2,154.4 28.4,154.4 32.6,154.4 36.8,154.4 41,154.4 45.2,154.4 49.4,154.4 53.6,154.4 57.8,154.4 62,154.4 66.2,154.4 70.4,154.4 74.6,154.4 78.8,154.4 83,154.4 87.2,154.4 91.4,154.4 95.6,154.4 99.8,154.4 104,154.4 108.2,154.4 112.4,154.4 116.6,154.4 120.8,154.4 125,154.4 129.2,154.4 133.4,154.4 137.6,154.4 141.8,154.4 146,154.4 150.2,154.4 154.4,154.4 158.6,154.4 162.8,154.4 167,154.4 188,154.4 192.2,154.4 196.4,154.4 200.6,154.4 204.8,154.4 209,154.4 213.2,154.4 217.4,154.4 221.6,154.4 225.8,154.4 230,154.4 234.2,154.4 238.4,154.4 242.6,154.4 246.8,154.4 251,154.4 255.2,154.4 259.4,154.4 263.6,154.4 267.8,154.4 272,154.4 276.2,154.4 280.4,154.4 284.6,154.4 288.8,154.4 293,154.4 297.2,154.4 301.4,154.4 305.6,154.4 309.8,154.4 314,154.4 318.2,154.4 322.4,154.4 326.6,154.4 330.8,154.4 335,154.4 339.2,154.4 5.3,158.6 9.5,158.6 13.7,158.6 17.9,158.6 22.1,158.6 26.3,158.6 30.5,158.6 34.7,158.6 38.9,158.6 43.1,158.6 47.3,158.6 51.5,158.6 55.7,158.6 59.9,158.6 64.1,158.6 68.3,158.6 72.5,158.6 76.7,158.6 80.9,158.6 85.1,158.6 89.3,158.6 93.5,158.6 97.7,158.6 101.9,158.6 106.1,158.6 110.3,158.6 114.5,158.6 118.7,158.6 122.9,158.6 127.1,158.6 131.3,158.6 135.5,158.6 139.7,158.6 143.9,158.6 148.1,158.6 152.3,158.6 156.5,158.6 160.7,158.6 164.9,158.6 169.1,158.6 190.1,158.6 194.3,158.6 198.5,158.6 202.7,158.6 206.9,158.6 211.1,158.6 215.3,158.6 219.5,158.6 223.7,158.6 227.9,158.6 232.1,158.6 236.3,158.6 240.5,158.6 244.7,158.6 248.9,158.6 253.1,158.6 257.3,158.6 261.5,158.6 265.7,158.6 269.9,158.6 274.1,158.6 278.3,158.6 282.5,158.6 286.7,158.6 290.9,158.6 295.1,158.6 299.3,158.6 303.5,158.6 307.7,158.6 311.9,158.6 316.1,158.6 320.3,158.6 324.5,158.6 328.7,158.6 332.9,158.6 337.1,158.6 341.3,158.6 345.5,158.6 3.2,162.8 7.4,162.8 11.6,162.8 15.8,162.8 20,162.8 24.2,162.8 28.4,162.8 32.6,162.8 36.8,162.8 41,162.8 45.2,162.8 49.4,162.8 53.6,162.8 57.8,162.8 62,162.8 66.2,162.8 70.4,162.8 74.6,162.8 78.8,162.8 83,162.8 87.2,162.8 91.4,162.8 95.6,162.8 99.8,162.8 104,162.8 108.2,162.8 112.4,162.8 116.6,162.8 120.8,162.8 125,162.8 129.2,162.8 133.4,162.8 137.6,162.8 141.8,162.8 146,162.8 150.2,162.8 154.4,162.8 158.6,162.8 162.8,162.8 167,162.8 171.2,162.8 196.4,162.8 200.6,162.8 204.8,162.8 209,162.8 213.2,162.8 217.4,162.8 221.6,162.8 225.8,162.8 230,162.8 234.2,162.8 238.4,162.8 242.6,162.8 246.8,162.8 251,162.8 255.2,162.8 259.4,162.8 263.6,162.8 267.8,162.8 272,162.8 276.2,162.8 280.4,162.8 284.6,162.8 288.8,162.8 293,162.8 297.2,162.8 301.4,162.8 305.6,162.8 309.8,162.8 314,162.8 318.2,162.8 322.4,162.8 326.6,162.8 330.8,162.8 335,162.8 339.2,162.8 343.4,162.8 5.3,167 9.5,167 13.7,167 17.9,167 22.1,167 26.3,167 30.5,167 34.7,167 38.9,167 43.1,167 47.3,167 51.5,167 55.7,167 59.9,167 64.1,167 68.3,167 72.5,167 76.7,167 80.9,167 85.1,167 89.3,167 93.5,167 97.7,167 101.9,167 106.1,167 110.3,167 114.5,167 118.7,167 122.9,167 127.1,167 131.3,167 135.5,167 139.7,167 143.9,167 148.1,167 152.3,167 156.5,167 160.7,167 164.9,167 169.1,167 173.3,167 177.5,167 198.5,167 202.7,167 206.9,167 211.1,167 215.3,167 219.5,167 223.7,167 227.9,167 232.1,167 236.3,167 240.5,167 244.7,167 248.9,167 253.1,167 257.3,167 261.5,167 265.7,167 269.9,167 274.1,167 278.3,167 282.5,167 286.7,167 290.9,167 295.1,167 299.3,167 303.5,167 307.7,167 311.9,167 316.1,167 320.3,167 324.5,167 328.7,167 332.9,167 337.1,167 341.3,167 345.5,167 3.2,171.2 7.4,171.2 11.6,171.2 15.8,171.2 20,171.2 24.2,171.2 28.4,171.2 32.6,171.2 36.8,171.2 41,171.2 45.2,171.2 49.4,171.2 53.6,171.2 57.8,171.2 62,171.2 66.2,171.2 70.4,171.2 74.6,171.2 78.8,171.2 83,171.2 87.2,171.2 91.4,171.2 95.6,171.2 99.8,171.2 104,171.2 108.2,171.2 112.4,171.2 116.6,171.2 120.8,171.2 125,171.2 129.2,171.2 133.4,171.2 137.6,171.2 141.8,171.2 146,171.2 150.2,171.2 154.4,171.2 158.6,171.2 162.8,171.2 167,171.2 171.2,171.2 175.4,171.2 179.6,171.2 255.2,171.2 259.4,171.2 263.6,171.2 267.8,171.2 272,171.2 276.2,171.2 280.4,171.2 284.6,171.2 288.8,171.2 293,171.2 297.2,171.2 301.4,171.2 305.6,171.2 309.8,171.2 314,171.2 318.2,171.2 322.4,171.2 326.6,171.2 330.8,171.2 335,171.2 339.2,171.2 343.4,171.2 9.5,175.4 13.7,175.4 17.9,175.4 22.1,175.4 26.3,175.4 30.5,175.4 34.7,175.4 38.9,175.4 43.1,175.4 47.3,175.4 51.5,175.4 55.7,175.4 59.9,175.4 64.1,175.4 68.3,175.4 72.5,175.4 76.7,175.4 80.9,175.4 85.1,175.4 89.3,175.4 93.5,175.4 97.7,175.4 101.9,175.4 106.1,175.4 110.3,175.4 114.5,175.4 118.7,175.4 122.9,175.4 127.1,175.4 131.3,175.4 135.5,175.4 139.7,175.4 143.9,175.4 148.1,175.4 152.3,175.4 156.5,175.4 160.7,175.4 164.9,175.4 169.1,175.4 173.3,175.4 177.5,175.4 181.7,175.4 257.3,175.4 261.5,175.4 265.7,175.4 269.9,175.4 274.1,175.4 278.3,175.4 282.5,175.4 286.7,175.4 290.9,175.4 295.1,175.4 299.3,175.4 303.5,175.4 307.7,175.4 311.9,175.4 316.1,175.4 320.3,175.4 324.5,175.4 328.7,175.4 332.9,175.4 337.1,175.4 3.2,179.6 7.4,179.6 11.6,179.6 15.8,179.6 20,179.6 24.2,179.6 28.4,179.6 32.6,179.6 36.8,179.6 41,179.6 45.2,179.6 49.4,179.6 53.6,179.6 57.8,179.6 62,179.6 66.2,179.6 70.4,179.6 74.6,179.6 78.8,179.6 83,179.6 87.2,179.6 91.4,179.6 95.6,179.6 99.8,179.6 104,179.6 108.2,179.6 112.4,179.6 116.6,179.6 120.8,179.6 125,179.6 129.2,179.6 133.4,179.6 137.6,179.6 141.8,179.6 146,179.6 150.2,179.6 154.4,179.6 158.6,179.6 162.8,179.6 167,179.6 171.2,179.6 175.4,179.6 179.6,179.6 255.2,179.6 259.4,179.6 263.6,179.6 267.8,179.6 272,179.6 276.2,179.6 280.4,179.6 284.6,179.6 288.8,179.6 293,179.6 297.2,179.6 301.4,179.6 305.6,179.6 309.8,179.6 314,179.6 318.2,179.6 322.4,179.6 326.6,179.6 330.8,179.6 335,179.6 339.2,179.6 343.4,179.6 5.3,183.8 9.5,183.8 13.7,183.8 17.9,183.8 22.1,183.8 26.3,183.8 30.5,183.8 34.7,183.8 38.9,183.8 47.3,183.8 51.5,183.8 55.7,183.8 59.9,183.8 64.1,183.8 68.3,183.8 72.5,183.8 76.7,183.8 80.9,183.8 85.1,183.8 89.3,183.8 93.5,183.8 97.7,183.8 101.9,183.8 106.1,183.8 110.3,183.8 114.5,183.8 118.7,183.8 122.9,183.8 127.1,183.8 131.3,183.8 135.5,183.8 139.7,183.8 143.9,183.8 148.1,183.8 152.3,183.8 156.5,183.8 160.7,183.8 164.9,183.8 169.1,183.8 173.3,183.8 198.5,183.8 202.7,183.8 206.9,183.8 211.1,183.8 215.3,183.8 219.5,183.8 223.7,183.8 227.9,183.8 232.1,183.8 236.3,183.8 240.5,183.8 244.7,183.8 248.9,183.8 253.1,183.8 257.3,183.8 261.5,183.8 265.7,183.8 269.9,183.8 274.1,183.8 278.3,183.8 282.5,183.8 286.7,183.8 290.9,183.8 295.1,183.8 299.3,183.8 311.9,183.8 316.1,183.8 320.3,183.8 324.5,183.8 328.7,183.8 332.9,183.8 337.1,183.8 341.3,183.8 345.5,183.8 3.2,188 7.4,188 11.6,188 15.8,188 20,188 24.2,188 28.4,188 32.6,188 53.6,188 57.8,188 62,188 66.2,188 70.4,188 74.6,188 78.8,188 83,188 87.2,188 91.4,188 95.6,188 99.8,188 104,188 108.2,188 112.4,188 116.6,188 120.8,188 125,188 129.2,188 133.4,188 137.6,188 141.8,188 146,188 150.2,188 154.4,188 158.6,188 162.8,188 167,188 171.2,188 196.4,188 200.6,188 204.8,188 209,188 213.2,188 217.4,188 221.6,188 225.8,188 230,188 234.2,188 238.4,188 242.6,188 246.8,188 251,188 255.2,188 259.4,188 263.6,188 267.8,188 272,188 276.2,188 280.4,188 284.6,188 288.8,188 293,188 297.2,188 318.2,188 322.4,188 326.6,188 330.8,188 335,188 339.2,188 343.4,188 5.3,192.2 9.5,192.2 13.7,192.2 17.9,192.2 22.1,192.2 26.3,192.2 30.5,192.2 34.7,192.2 55.7,192.2 59.9,192.2 64.1,192.2 68.3,192.2 72.5,192.2 76.7,192.2 80.9,192.2 85.1,192.2 89.3,192.2 93.5,192.2 97.7,192.2 101.9,192.2 106.1,192.2 110.3,192.2 114.5,192.2 118.7,192.2 122.9,192.2 127.1,192.2 131.3,192.2 135.5,192.2 139.7,192.2 143.9,192.2 148.1,192.2 152.3,192.2 156.5,192.2 160.7,192.2 164.9,192.2 190.1,192.2 194.3,192.2 198.5,192.2 202.7,192.2 206.9,192.2 211.1,192.2 215.3,192.2 219.5,192.2 223.7,192.2 227.9,192.2 232.1,192.2 236.3,192.2 240.5,192.2 244.7,192.2 248.9,192.2 253.1,192.2 257.3,192.2 261.5,192.2 265.7,192.2 269.9,192.2 274.1,192.2 278.3,192.2 282.5,192.2 286.7,192.2 290.9,192.2 295.1,192.2 316.1,192.2 320.3,192.2 324.5,192.2 328.7,192.2 332.9,192.2 337.1,192.2 341.3,192.2 345.5,192.2 11.6,196.4 15.8,196.4 20,196.4 24.2,196.4 28.4,196.4 32.6,196.4 53.6,196.4 57.8,196.4 62,196.4 66.2,196.4 70.4,196.4 74.6,196.4 78.8,196.4 83,196.4 87.2,196.4 91.4,196.4 95.6,196.4 99.8,196.4 104,196.4 108.2,196.4 112.4,196.4 116.6,196.4 120.8,196.4 125,196.4 129.2,196.4 133.4,196.4 137.6,196.4 141.8,196.4 146,196.4 150.2,196.4 154.4,196.4 158.6,196.4 162.8,196.4 167,196.4 188,196.4 192.2,196.4 196.4,196.4 200.6,196.4 204.8,196.4 209,196.4 213.2,196.4 217.4,196.4 221.6,196.4 225.8,196.4 230,196.4 234.2,196.4 238.4,196.4 242.6,196.4 246.8,196.4 251,196.4 255.2,196.4 259.4,196.4 263.6,196.4 267.8,196.4 272,196.4 276.2,196.4 280.4,196.4 284.6,196.4 288.8,196.4 293,196.4 297.2,196.4 314,196.4 318.2,196.4 322.4,196.4 326.6,196.4 330.8,196.4 335,196.4 339.2,196.4 9.5,200.6 13.7,200.6 17.9,200.6 22.1,200.6 26.3,200.6 30.5,200.6 34.7,200.6 38.9,200.6 43.1,200.6 47.3,200.6 51.5,200.6 55.7,200.6 59.9,200.6 64.1,200.6 68.3,200.6 72.5,200.6 76.7,200.6 80.9,200.6 85.1,200.6 89.3,200.6 93.5,200.6 97.7,200.6 101.9,200.6 106.1,200.6 110.3,200.6 114.5,200.6 118.7,200.6 122.9,200.6 127.1,200.6 131.3,200.6 135.5,200.6 139.7,200.6 143.9,200.6 148.1,200.6 152.3,200.6 156.5,200.6 160.7,200.6 164.9,200.6 185.9,200.6 190.1,200.6 194.3,200.6 198.5,200.6 202.7,200.6 206.9,200.6 211.1,200.6 215.3,200.6 219.5,200.6 223.7,200.6 227.9,200.6 232.1,200.6 236.3,200.6 240.5,200.6 244.7,200.6 248.9,200.6 253.1,200.6 257.3,200.6 261.5,200.6 265.7,200.6 269.9,200.6 274.1,200.6 278.3,200.6 282.5,200.6 286.7,200.6 290.9,200.6 295.1,200.6 299.3,200.6 303.5,200.6 307.7,200.6 311.9,200.6 316.1,200.6 320.3,200.6 324.5,200.6 328.7,200.6 332.9,200.6 337.1,200.6 341.3,200.6 3.2,204.8 7.4,204.8 11.6,204.8 15.8,204.8 20,204.8 24.2,204.8 28.4,204.8 32.6,204.8 36.8,204.8 41,204.8 45.2,204.8 49.4,204.8 53.6,204.8 57.8,204.8 62,204.8 66.2,204.8 70.4,204.8 74.6,204.8 78.8,204.8 83,204.8 87.2,204.8 91.4,204.8 95.6,204.8 99.8,204.8 104,204.8 108.2,204.8 112.4,204.8 116.6,204.8 120.8,204.8 125,204.8 129.2,204.8 133.4,204.8 137.6,204.8 141.8,204.8 146,204.8 150.2,204.8 154.4,204.8 158.6,204.8 162.8,204.8 167,204.8 183.8,204.8 188,204.8 192.2,204.8 196.4,204.8 200.6,204.8 204.8,204.8 209,204.8 213.2,204.8 217.4,204.8 221.6,204.8 225.8,204.8 230,204.8 234.2,204.8 238.4,204.8 242.6,204.8 246.8,204.8 251,204.8 255.2,204.8 259.4,204.8 263.6,204.8 267.8,204.8 272,204.8 276.2,204.8 280.4,204.8 284.6,204.8 288.8,204.8 293,204.8 297.2,204.8 301.4,204.8 305.6,204.8 309.8,204.8 314,204.8 318.2,204.8 322.4,204.8 326.6,204.8 330.8,204.8 335,204.8 339.2,204.8 343.4,204.8 5.3,209 9.5,209 13.7,209 17.9,209 22.1,209 26.3,209 30.5,209 34.7,209 38.9,209 43.1,209 47.3,209 51.5,209 55.7,209 59.9,209 64.1,209 68.3,209 72.5,209 76.7,209 80.9,209 85.1,209 89.3,209 93.5,209 97.7,209 101.9,209 106.1,209 110.3,209 114.5,209 118.7,209 122.9,209 127.1,209 131.3,209 135.5,209 139.7,209 143.9,209 148.1,209 152.3,209 156.5,209 160.7,209 164.9,209 185.9,209 190.1,209 194.3,209 198.5,209 202.7,209 206.9,209 211.1,209 215.3,209 219.5,209 223.7,209 227.9,209 232.1,209 236.3,209 240.5,209 244.7,209 248.9,209 253.1,209 257.3,209 261.5,209 265.7,209 269.9,209 274.1,209 278.3,209 282.5,209 286.7,209 290.9,209 295.1,209 299.3,209 303.5,209 307.7,209 311.9,209 316.1,209 320.3,209 324.5,209 328.7,209 332.9,209 337.1,209 341.3,209 345.5,209 3.2,213.2 7.4,213.2 11.6,213.2 15.8,213.2 20,213.2 24.2,213.2 28.4,213.2 32.6,213.2 36.8,213.2 41,213.2 45.2,213.2 49.4,213.2 53.6,213.2 57.8,213.2 62,213.2 66.2,213.2 70.4,213.2 74.6,213.2 78.8,213.2 83,213.2 87.2,213.2 91.4,213.2 95.6,213.2 99.8,213.2 104,213.2 108.2,213.2 112.4,213.2 116.6,213.2 120.8,213.2 125,213.2 129.2,213.2 133.4,213.2 137.6,213.2 141.8,213.2 146,213.2 150.2,213.2 154.4,213.2 158.6,213.2 162.8,213.2 167,213.2 183.8,213.2 188,213.2 192.2,213.2 196.4,213.2 200.6,213.2 204.8,213.2 209,213.2 213.2,213.2 217.4,213.2 221.6,213.2 225.8,213.2 230,213.2 234.2,213.2 238.4,213.2 242.6,213.2 246.8,213.2 251,213.2 255.2,213.2 259.4,213.2 263.6,213.2 267.8,213.2 272,213.2 276.2,213.2 280.4,213.2 284.6,213.2 288.8,213.2 293,213.2 297.2,213.2 301.4,213.2 305.6,213.2 309.8,213.2 314,213.2 318.2,213.2 322.4,213.2 326.6,213.2 330.8,213.2 335,213.2 339.2,213.2 343.4,213.2 9.5,217.4 13.7,217.4 17.9,217.4 22.1,217.4 26.3,217.4 30.5,217.4 34.7,217.4 38.9,217.4 43.1,217.4 47.3,217.4 51.5,217.4 55.7,217.4 59.9,217.4 64.1,217.4 68.3,217.4 72.5,217.4 76.7,217.4 80.9,217.4 85.1,217.4 89.3,217.4 93.5,217.4 97.7,217.4 101.9,217.4 106.1,217.4 110.3,217.4 114.5,217.4 118.7,217.4 122.9,217.4 127.1,217.4 131.3,217.4 135.5,217.4 139.7,217.4 143.9,217.4 148.1,217.4 152.3,217.4 156.5,217.4 160.7,217.4 164.9,217.4 185.9,217.4 190.1,217.4 194.3,217.4 198.5,217.4 202.7,217.4 206.9,217.4 211.1,217.4 215.3,217.4 219.5,217.4 223.7,217.4 227.9,217.4 232.1,217.4 236.3,217.4 240.5,217.4 244.7,217.4 248.9,217.4 253.1,217.4 257.3,217.4 261.5,217.4 265.7,217.4 269.9,217.4 274.1,217.4 278.3,217.4 282.5,217.4 286.7,217.4 290.9,217.4 295.1,217.4 299.3,217.4 303.5,217.4 307.7,217.4 311.9,217.4 316.1,217.4 320.3,217.4 324.5,217.4 328.7,217.4 332.9,217.4 337.1,217.4 3.2,221.6 7.4,221.6 11.6,221.6 15.8,221.6 20,221.6 24.2,221.6 28.4,221.6 32.6,221.6 36.8,221.6 41,221.6 45.2,221.6 49.4,221.6 53.6,221.6 57.8,221.6 62,221.6 66.2,221.6 70.4,221.6 74.6,221.6 78.8,221.6 83,221.6 87.2,221.6 91.4,221.6 95.6,221.6 99.8,221.6 104,221.6 108.2,221.6 112.4,221.6 116.6,221.6 120.8,221.6 125,221.6 129.2,221.6 133.4,221.6 137.6,221.6 141.8,221.6 146,221.6 150.2,221.6 154.4,221.6 158.6,221.6 162.8,221.6 167,221.6 183.8,221.6 188,221.6 192.2,221.6 196.4,221.6 200.6,221.6 204.8,221.6 209,221.6 213.2,221.6 217.4,221.6 221.6,221.6 225.8,221.6 230,221.6 234.2,221.6 238.4,221.6 242.6,221.6 246.8,221.6 251,221.6 255.2,221.6 259.4,221.6 263.6,221.6 267.8,221.6 272,221.6 276.2,221.6 280.4,221.6 284.6,221.6 288.8,221.6 293,221.6 297.2,221.6 301.4,221.6 305.6,221.6 309.8,221.6 314,221.6 318.2,221.6 322.4,221.6 326.6,221.6 330.8,221.6 335,221.6 339.2,221.6 343.4,221.6 5.3,225.8 9.5,225.8 13.7,225.8 17.9,225.8 22.1,225.8 26.3,225.8 30.5,225.8 34.7,225.8 38.9,225.8 43.1,225.8 47.3,225.8 51.5,225.8 55.7,225.8 59.9,225.8 64.1,225.8 68.3,225.8 72.5,225.8 76.7,225.8 80.9,225.8 85.1,225.8 89.3,225.8 93.5,225.8 97.7,225.8 101.9,225.8 106.1,225.8 110.3,225.8 114.5,225.8 118.7,225.8 122.9,225.8 127.1,225.8 131.3,225.8 135.5,225.8 139.7,225.8 143.9,225.8 148.1,225.8 152.3,225.8 156.5,225.8 160.7,225.8 164.9,225.8 185.9,225.8 190.1,225.8 194.3,225.8 198.5,225.8 202.7,225.8 206.9,225.8 211.1,225.8 215.3,225.8 219.5,225.8 223.7,225.8 227.9,225.8 232.1,225.8 236.3,225.8 240.5,225.8 244.7,225.8 248.9,225.8 253.1,225.8 257.3,225.8 261.5,225.8 265.7,225.8 269.9,225.8 274.1,225.8 278.3,225.8 282.5,225.8 286.7,225.8 290.9,225.8 295.1,225.8 299.3,225.8 303.5,225.8 307.7,225.8 311.9,225.8 316.1,225.8 320.3,225.8 324.5,225.8 328.7,225.8 332.9,225.8 337.1,225.8 341.3,225.8 345.5,225.8 3.2,230 7.4,230 11.6,230 15.8,230 20,230 24.2,230 28.4,230 32.6,230 36.8,230 41,230 45.2,230 49.4,230 53.6,230 57.8,230 62,230 66.2,230 70.4,230 74.6,230 78.8,230 83,230 87.2,230 91.4,230 95.6,230 99.8,230 104,230 108.2,230 112.4,230 116.6,230 120.8,230 125,230 129.2,230 133.4,230 137.6,230 141.8,230 146,230 150.2,230 154.4,230 158.6,230 162.8,230 167,230 183.8,230 188,230 192.2,230 196.4,230 200.6,230 204.8,230 209,230 213.2,230 217.4,230 221.6,230 225.8,230 230,230 234.2,230 238.4,230 242.6,230 246.8,230 251,230 255.2,230 259.4,230 263.6,230 267.8,230 272,230 276.2,230 280.4,230 284.6,230 288.8,230 293,230 297.2,230 301.4,230 305.6,230 309.8,230 314,230 318.2,230 322.4,230 326.6,230 330.8,230 335,230 339.2,230 343.4,230 5.3,234.2 9.5,234.2 13.7,234.2 17.9,234.2 22.1,234.2 26.3,234.2 30.5,234.2 34.7,234.2 38.9,234.2 43.1,234.2 47.3,234.2 51.5,234.2 55.7,234.2 59.9,234.2 64.1,234.2 68.3,234.2 72.5,234.2 76.7,234.2 80.9,234.2 85.1,234.2 89.3,234.2 93.5,234.2 97.7,234.2 101.9,234.2 106.1,234.2 110.3,234.2 114.5,234.2 118.7,234.2 122.9,234.2 127.1,234.2 131.3,234.2 135.5,234.2 139.7,234.2 143.9,234.2 148.1,234.2 152.3,234.2 156.5,234.2 160.7,234.2 164.9,234.2 185.9,234.2 190.1,234.2 194.3,234.2 198.5,234.2 202.7,234.2 206.9,234.2 211.1,234.2 215.3,234.2 219.5,234.2 223.7,234.2 227.9,234.2 232.1,234.2 236.3,234.2 240.5,234.2 244.7,234.2 248.9,234.2 253.1,234.2 257.3,234.2 261.5,234.2 265.7,234.2 269.9,234.2 274.1,234.2 278.3,234.2 282.5,234.2 286.7,234.2 290.9,234.2 295.1,234.2 299.3,234.2 303.5,234.2 307.7,234.2 311.9,234.2 316.1,234.2 320.3,234.2 324.5,234.2 328.7,234.2 332.9,234.2 337.1,234.2 341.3,234.2 345.5,234.2 11.6,238.4 15.8,238.4 20,238.4 24.2,238.4 28.4,238.4 32.6,238.4 36.8,238.4 41,238.4 45.2,238.4 49.4,238.4 53.6,238.4 57.8,238.4 62,238.4 66.2,238.4 70.4,238.4 74.6,238.4 78.8,238.4 83,238.4 87.2,238.4 91.4,238.4 95.6,238.4 99.8,238.4 104,238.4 108.2,238.4 112.4,238.4 116.6,238.4 120.8,238.4 125,238.4 129.2,238.4 133.4,238.4 137.6,238.4 141.8,238.4 146,238.4 150.2,238.4 154.4,238.4 158.6,238.4 162.8,238.4 167,238.4 183.8,238.4 188,238.4 192.2,238.4 196.4,238.4 200.6,238.4 204.8,238.4 209,238.4 213.2,238.4 217.4,238.4 221.6,238.4 225.8,238.4 230,238.4 234.2,238.4 238.4,238.4 242.6,238.4 246.8,238.4 251,238.4 255.2,238.4 259.4,238.4 263.6,238.4 267.8,238.4 272,238.4 276.2,238.4 280.4,238.4 284.6,238.4 288.8,238.4 293,238.4 297.2,238.4 301.4,238.4 305.6,238.4 309.8,238.4 314,238.4 318.2,238.4 322.4,238.4 326.6,238.4 330.8,238.4 335,238.4 339.2,238.4 9.5,242.6 13.7,242.6 17.9,242.6 22.1,242.6 26.3,242.6 30.5,242.6 34.7,242.6 38.9,242.6 43.1,242.6 47.3,242.6 51.5,242.6 55.7,242.6 59.9,242.6 64.1,242.6 68.3,242.6 72.5,242.6 76.7,242.6 80.9,242.6 85.1,242.6 89.3,242.6 93.5,242.6 97.7,242.6 101.9,242.6 106.1,242.6 110.3,242.6 114.5,242.6 118.7,242.6 122.9,242.6 127.1,242.6 131.3,242.6 135.5,242.6 139.7,242.6 143.9,242.6 148.1,242.6 152.3,242.6 156.5,242.6 160.7,242.6 164.9,242.6 185.9,242.6 190.1,242.6 194.3,242.6 198.5,242.6 202.7,242.6 206.9,242.6 211.1,242.6 215.3,242.6 219.5,242.6 223.7,242.6 227.9,242.6 232.1,242.6 236.3,242.6 240.5,242.6 244.7,242.6 248.9,242.6 253.1,242.6 257.3,242.6 261.5,242.6 265.7,242.6 269.9,242.6 274.1,242.6 278.3,242.6 282.5,242.6 286.7,242.6 290.9,242.6 295.1,242.6 299.3,242.6 303.5,242.6 307.7,242.6 311.9,242.6 316.1,242.6 320.3,242.6 324.5,242.6 328.7,242.6 332.9,242.6 337.1,242.6 341.3,242.6 3.2,246.8 7.4,246.8 11.6,246.8 15.8,246.8 20,246.8 24.2,246.8 28.4,246.8 32.6,246.8 36.8,246.8 41,246.8 45.2,246.8 49.4,246.8 53.6,246.8 57.8,246.8 62,246.8 66.2,246.8 70.4,246.8 74.6,246.8 78.8,246.8 83,246.8 87.2,246.8 91.4,246.8 95.6,246.8 104,246.8 108.2,246.8 112.4,246.8 116.6,246.8 120.8,246.8 125,246.8 129.2,246.8 133.4,246.8 137.6,246.8 141.8,246.8 146,246.8 150.2,246.8 154.4,246.8 158.6,246.8 162.8,246.8 167,246.8 183.8,246.8 188,246.8 192.2,246.8 196.4,246.8 200.6,246.8 204.8,246.8 209,246.8 213.2,246.8 217.4,246.8 221.6,246.8 225.8,246.8 230,246.8 234.2,246.8 238.4,246.8 242.6,246.8 246.8,246.8 255.2,246.8 259.4,246.8 263.6,246.8 267.8,246.8 272,246.8 276.2,246.8 280.4,246.8 284.6,246.8 288.8,246.8 293,246.8 297.2,246.8 301.4,246.8 305.6,246.8 309.8,246.8 314,246.8 318.2,246.8 322.4,246.8 326.6,246.8 330.8,246.8 335,246.8 339.2,246.8 343.4,246.8 5.3,251 9.5,251 13.7,251 17.9,251 22.1,251 26.3,251 30.5,251 34.7,251 38.9,251 43.1,251 47.3,251 51.5,251 55.7,251 59.9,251 64.1,251 68.3,251 72.5,251 76.7,251 80.9,251 85.1,251 89.3,251 93.5,251 106.1,251 110.3,251 114.5,251 118.7,251 122.9,251 127.1,251 131.3,251 135.5,251 139.7,251 143.9,251 148.1,251 152.3,251 156.5,251 160.7,251 164.9,251 185.9,251 190.1,251 194.3,251 198.5,251 202.7,251 206.9,251 211.1,251 215.3,251 219.5,251 223.7,251 227.9,251 232.1,251 236.3,251 240.5,251 244.7,251 257.3,251 261.5,251 265.7,251 269.9,251 274.1,251 278.3,251 282.5,251 286.7,251 290.9,251 295.1,251 299.3,251 303.5,251 307.7,251 311.9,251 316.1,251 320.3,251 324.5,251 328.7,251 332.9,251 337.1,251 341.3,251 345.5,251 3.2,255.2 7.4,255.2 11.6,255.2 15.8,255.2 20,255.2 24.2,255.2 28.4,255.2 32.6,255.2 36.8,255.2 41,255.2 45.2,255.2 49.4,255.2 53.6,255.2 57.8,255.2 62,255.2 66.2,255.2 70.4,255.2 74.6,255.2 78.8,255.2 83,255.2 87.2,255.2 91.4,255.2 95.6,255.2 99.8,255.2 104,255.2 108.2,255.2 112.4,255.2 116.6,255.2 120.8,255.2 125,255.2 129.2,255.2 133.4,255.2 137.6,255.2 141.8,255.2 146,255.2 150.2,255.2 154.4,255.2 158.6,255.2 162.8,255.2 167,255.2 183.8,255.2 188,255.2 192.2,255.2 196.4,255.2 200.6,255.2 204.8,255.2 209,255.2 213.2,255.2 217.4,255.2 221.6,255.2 225.8,255.2 230,255.2 234.2,255.2 238.4,255.2 242.6,255.2 246.8,255.2 251,255.2 255.2,255.2 259.4,255.2 263.6,255.2 267.8,255.2 272,255.2 276.2,255.2 280.4,255.2 284.6,255.2 288.8,255.2 293,255.2 297.2,255.2 301.4,255.2 305.6,255.2 309.8,255.2 314,255.2 318.2,255.2 322.4,255.2 326.6,255.2 330.8,255.2 335,255.2 339.2,255.2 343.4,255.2 9.5,259.4 13.7,259.4 17.9,259.4 22.1,259.4 26.3,259.4 30.5,259.4 34.7,259.4 38.9,259.4 43.1,259.4 47.3,259.4 51.5,259.4 55.7,259.4 59.9,259.4 64.1,259.4 68.3,259.4 72.5,259.4 76.7,259.4 80.9,259.4 85.1,259.4 89.3,259.4 93.5,259.4 97.7,259.4 101.9,259.4 106.1,259.4 110.3,259.4 114.5,259.4 118.7,259.4 122.9,259.4 127.1,259.4 131.3,259.4 135.5,259.4 139.7,259.4 143.9,259.4 148.1,259.4 152.3,259.4 156.5,259.4 160.7,259.4 164.9,259.4 185.9,259.4 190.1,259.4 194.3,259.4 198.5,259.4 202.7,259.4 206.9,259.4 211.1,259.4 215.3,259.4 219.5,259.4 223.7,259.4 227.9,259.4 232.1,259.4 236.3,259.4 240.5,259.4 244.7,259.4 248.9,259.4 253.1,259.4 257.3,259.4 261.5,259.4 265.7,259.4 269.9,259.4 274.1,259.4 278.3,259.4 282.5,259.4 286.7,259.4 290.9,259.4 295.1,259.4 299.3,259.4 303.5,259.4 307.7,259.4 311.9,259.4 316.1,259.4 320.3,259.4 324.5,259.4 328.7,259.4 332.9,259.4 337.1,259.4 341.3,259.4 7.4,263.6 11.6,263.6 15.8,263.6 20,263.6 24.2,263.6 28.4,263.6 32.6,263.6 36.8,263.6 49.4,263.6 53.6,263.6 57.8,263.6 62,263.6 66.2,263.6 70.4,263.6 74.6,263.6 78.8,263.6 83,263.6 87.2,263.6 91.4,263.6 95.6,263.6 99.8,263.6 104,263.6 108.2,263.6 112.4,263.6 116.6,263.6 120.8,263.6 125,263.6 129.2,263.6 133.4,263.6 137.6,263.6 141.8,263.6 146,263.6 150.2,263.6 154.4,263.6 158.6,263.6 162.8,263.6 167,263.6 183.8,263.6 188,263.6 192.2,263.6 196.4,263.6 200.6,263.6 204.8,263.6 209,263.6 213.2,263.6 217.4,263.6 221.6,263.6 225.8,263.6 230,263.6 234.2,263.6 238.4,263.6 242.6,263.6 246.8,263.6 251,263.6 255.2,263.6 259.4,263.6 263.6,263.6 267.8,263.6 272,263.6 276.2,263.6 280.4,263.6 284.6,263.6 288.8,263.6 293,263.6 297.2,263.6 301.4,263.6 309.8,263.6 314,263.6 318.2,263.6 322.4,263.6 326.6,263.6 330.8,263.6 335,263.6 339.2,263.6 5.3,267.8 9.5,267.8 13.7,267.8 17.9,267.8 22.1,267.8 26.3,267.8 30.5,267.8 34.7,267.8 51.5,267.8 55.7,267.8 59.9,267.8 64.1,267.8 68.3,267.8 72.5,267.8 76.7,267.8 80.9,267.8 85.1,267.8 89.3,267.8 93.5,267.8 97.7,267.8 101.9,267.8 106.1,267.8 110.3,267.8 114.5,267.8 118.7,267.8 122.9,267.8 127.1,267.8 131.3,267.8 135.5,267.8 139.7,267.8 143.9,267.8 148.1,267.8 152.3,267.8 156.5,267.8 160.7,267.8 164.9,267.8 185.9,267.8 190.1,267.8 194.3,267.8 198.5,267.8 202.7,267.8 206.9,267.8 211.1,267.8 215.3,267.8 219.5,267.8 223.7,267.8 227.9,267.8 232.1,267.8 236.3,267.8 240.5,267.8 244.7,267.8 248.9,267.8 253.1,267.8 257.3,267.8 261.5,267.8 265.7,267.8 269.9,267.8 274.1,267.8 278.3,267.8 282.5,267.8 286.7,267.8 290.9,267.8 295.1,267.8 316.1,267.8 320.3,267.8 324.5,267.8 328.7,267.8 332.9,267.8 337.1,267.8 341.3,267.8 345.5,267.8 3.2,272 7.4,272 11.6,272 15.8,272 20,272 24.2,272 28.4,272 32.6,272 53.6,272 57.8,272 62,272 66.2,272 70.4,272 74.6,272 78.8,272 83,272 87.2,272 91.4,272 95.6,272 99.8,272 104,272 108.2,272 112.4,272 116.6,272 120.8,272 125,272 129.2,272 133.4,272 137.6,272 141.8,272 146,272 150.2,272 154.4,272 158.6,272 162.8,272 167,272 183.8,272 188,272 192.2,272 196.4,272 200.6,272 204.8,272 209,272 213.2,272 217.4,272 221.6,272 225.8,272 230,272 234.2,272 238.4,272 242.6,272 246.8,272 251,272 255.2,272 259.4,272 263.6,272 267.8,272 272,272